# Altium PCB Volt Regulator.PcbDoc
Units mm, origin at the board's own origin, x right, y up, seen from the top; angles counter-clockwise.
Board outline 80 x 80 mm, 2 copper layers (Top Layer, Bottom Layer); 16 components, 5 nets, 39 pads, 0 vias.
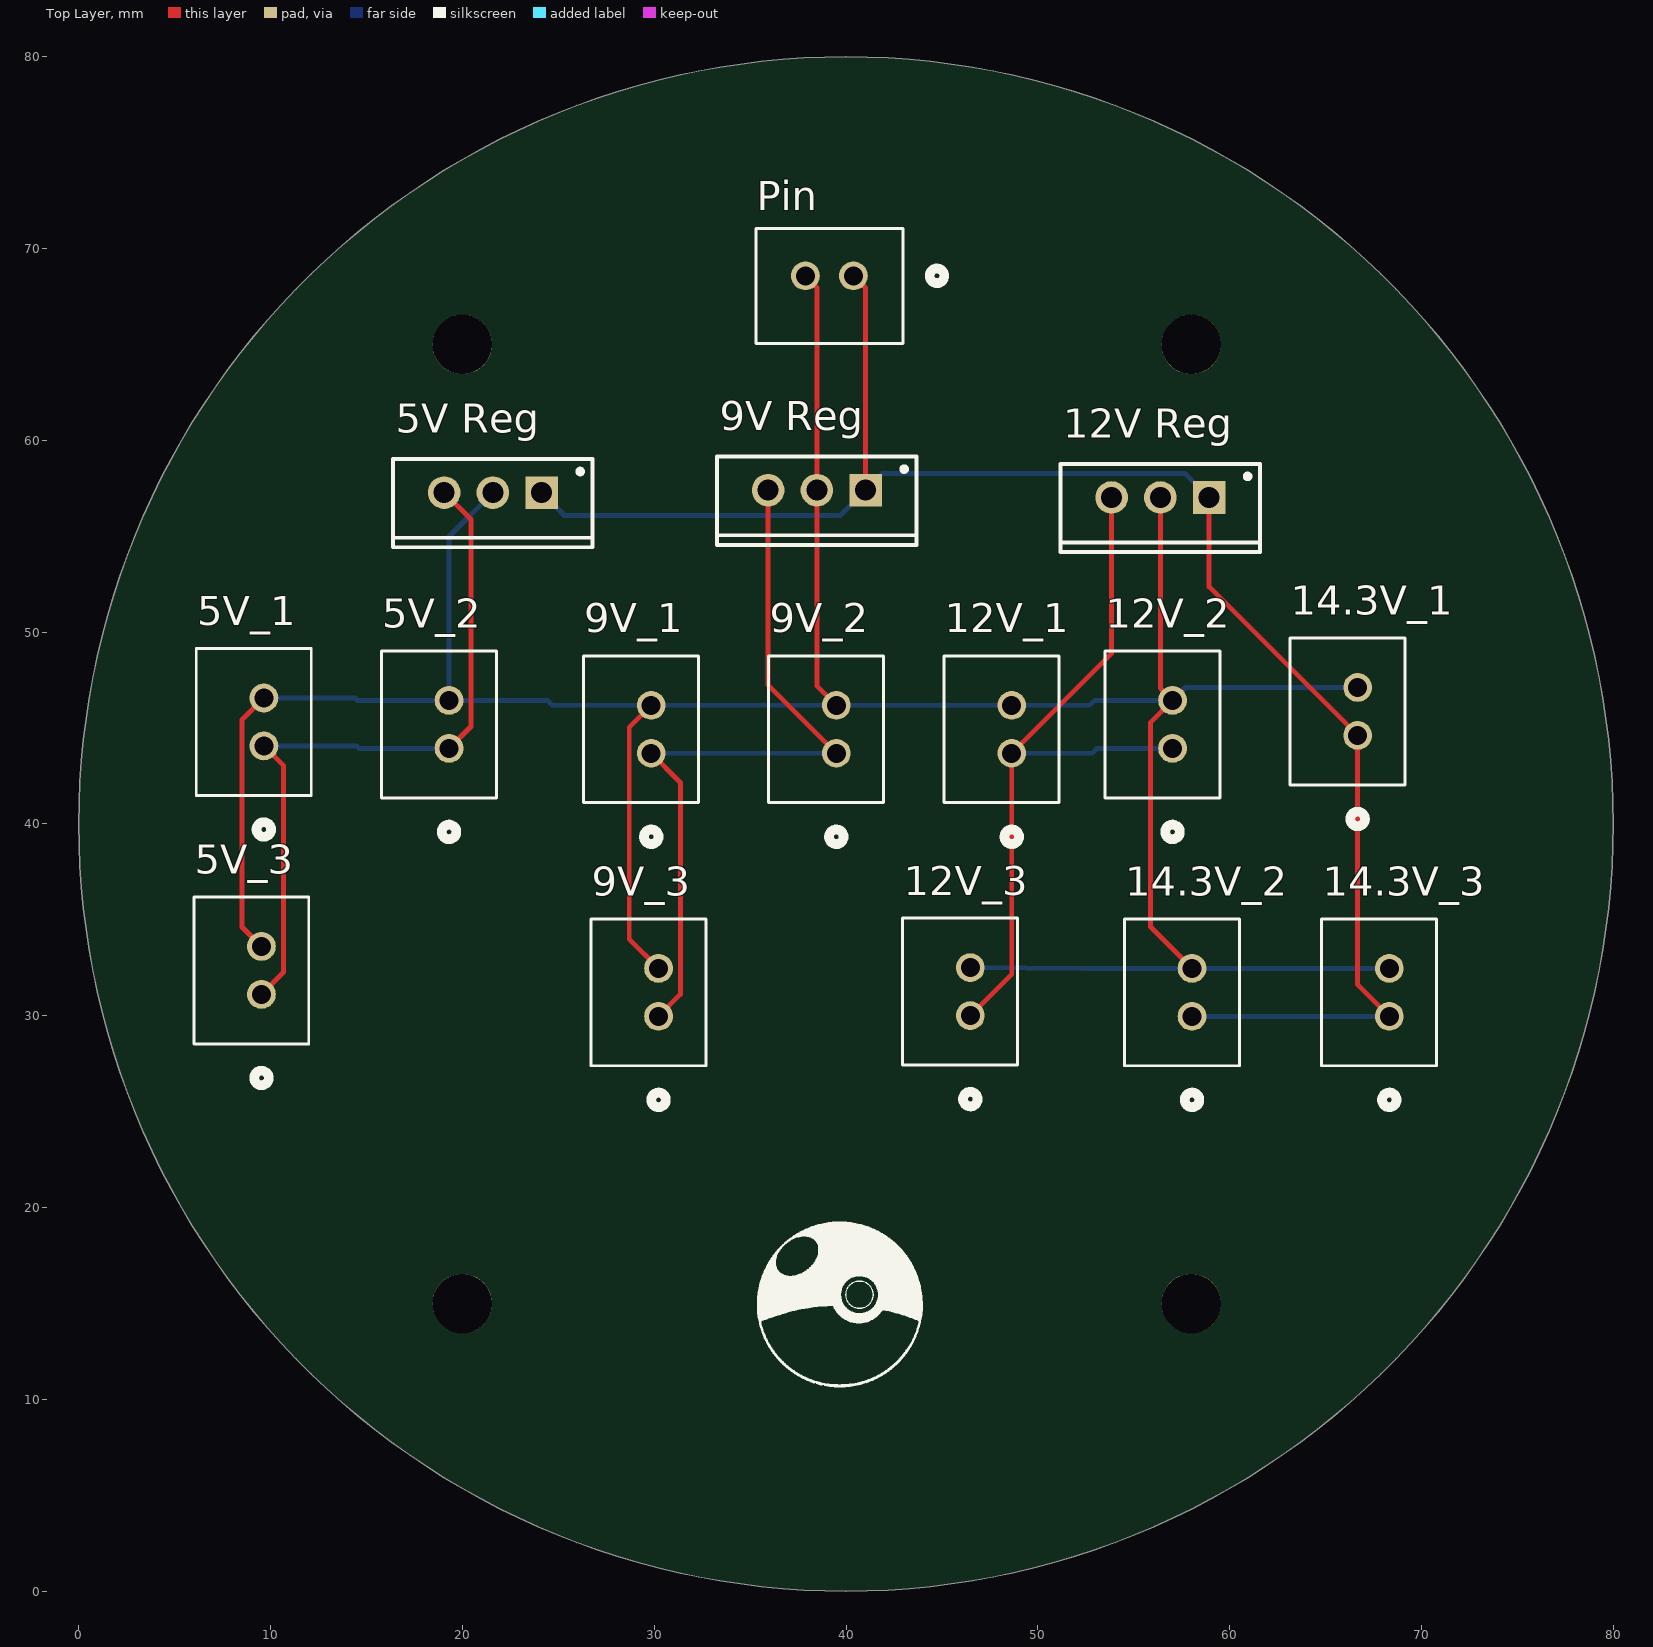
[diagram p0: Top Layer view]
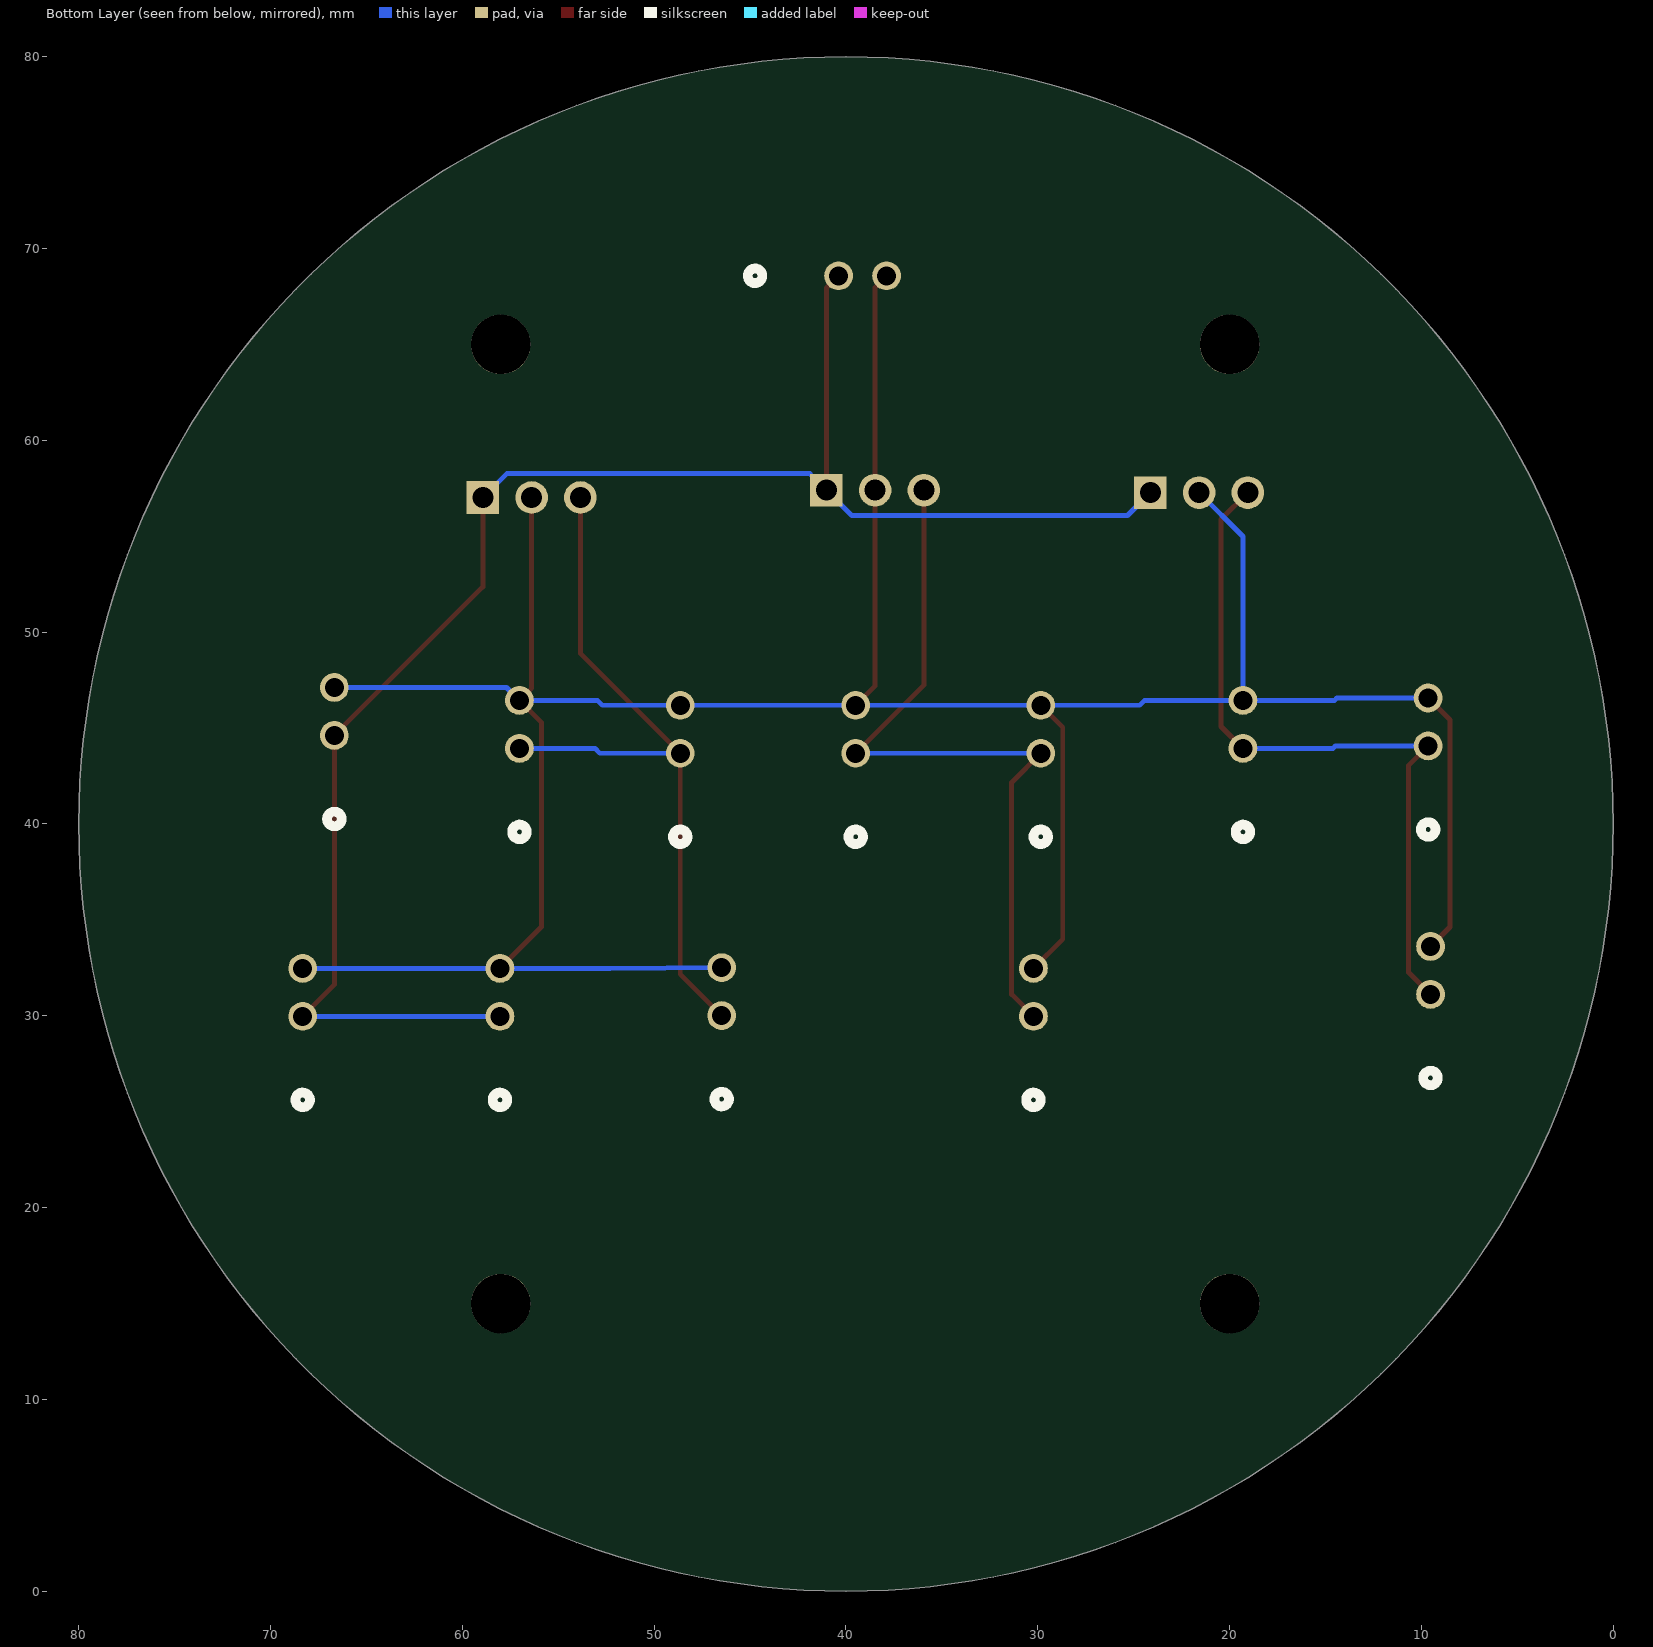
[diagram p1: Bottom Layer view, seen from below]

## Layer stack, top to bottom
Top Solder: solder mask 0.0102, Solder Resist, Dk 3.5
Top Layer: signal copper 0.0356
Dielectric 1: dielectric 0.32, FR-4, Dk 4.8
Bottom Layer: signal copper 0.0356
Bottom Solder: solder mask 0.0102, Solder Resist, Dk 3.5

## Board outline
40,0 cw(c40,40) 0,40 cw(c40,40) 40,80 cw(c40,40) 80,40 cw(c40,40)

## Design rules (kind name [scope] priority, off if disabled: settings)
Clearance [All] p1: gap=0.254 ignorepadtopadclearanceinfootprint=FALSE
PolygonConnect [All] p1: connectstyle=Relief reliefconductorwidth=0.254 reliefentries=4 polygonreliefangle="90 Angle" airgapwidth=0.254
RoutingVias [All] p1: holewidth=0.711 width=1.27 viastyle="Through Hole" minholewidth=0.711 minwidth=1.27 maxholewidth=0.711 maxwidth=1.27
SolderMaskExpansion [All] p1: expansion=0.102 istentingtop=FALSE
Width [All] p1: maxlimit=0.254 minlimit=0.254 preferedwidth=0.254
30 further rules are at their usual default settings.

## Components (designator, comment, footprint, x,y, rotation, side; value= is the part's Value field where it differs from the comment)
"5V Reg" "L7805ABV" TO220 21.59,57.277 r180 top
5V_1 "Connector" CONN_B2B-XH-A_JST 9.652,44.069 r90 top
5V_2 "Connector" CONN_B2B-XH-A_JST 19.304,43.942 r90 top
5V_3 "Connector" CONN_B2B-XH-A_JST 9.525,31.115 r90 top
"9V Reg" "L78L09ACZ-TR" TO220 38.481,57.404 r180 top
9V_1 "Connector" CONN_B2B-XH-A_JST 29.845,43.688 r90 top
9V_2 "Connector" CONN_B2B-XH-A_JST 39.497,43.688 r90 top
9V_3 "Connector" CONN_B2B-XH-A_JST 30.226,29.972 r90 top
"12V Reg" "L78L09ACZ-TR" TO220 56.388,57.023 r180 top
12V_1 "Connector" CONN_B2B-XH-A_JST 48.641,43.688 r90 top
12V_2 "Connector" CONN_B2B-XH-A_JST 57.023,43.942 r90 top
12V_3 "Connector" CONN_B2B-XH-A_JST 46.482,30.012 r90 top
14.3V_1 "Connector" CONN_B2B-XH-A_JST 66.675,44.617 r90 top
14.3V_2 "Connector" CONN_B2B-XH-A_JST 58.039,29.972 r90 top
14.3V_3 "Connector" CONN_B2B-XH-A_JST 68.326,29.972 r90 top
Pin "Connector" CONN_B2B-XH-A_JST 40.386,68.58 r180 top

## Footprints (in the part's own frame and the unit in brackets; to place one, negate y for a bottom-side part, rotate by r counter-clockwise, add the part's x,y. Pads: shape width x height; smd on the part's side, far side on the other; paste and mask are expansions set on the pad)
CONN_B2B-XH-A_JST [mil]
  round 59 / inner round 60 / far side round 59 hole 39 paste-99999 mask+0: 1(0,0) 2(98.43,0)
  silkscreen extent -186,-97 200,139
TO220 [mm] "TO, Thru-Hole, Vertical, Heatsink Mounted; 3 In-Line Leads; Pitch 2.54 mm"
  rect 1.7x1.7 hole 1.1: 1(-2.54,0)
  round 1.7 hole 1.1: 2(0,0) 3(2.54,0)
  silkscreen extent -5.2,-1.75 5.2,2.85, body extent -5.25,-1.8 5.25,2.9, height 19.7

## Part data
"5V Reg": "Fixed Positive Standard Regulator, 5VBIPolar, PSFM3", Case/Package=TO-220, Dropout Voltage1-Nom=2V, Input Voltage Absolute-Max=35V, Manufacturer=STMicroelectronics, Max Supply Voltage=25V, Min Input Voltage=7.5V, Operating Temperature, TJ-Max=125°C, Operating Temperature, TJ-Min=-40°C, Output Current1-Max=1.5A, Output Voltage1-Max=5.2V, Output Voltage1-Min=4.8V, Output Voltage1-Nom=5V, Package Equivalence Code=SIP3,.1TB, Package Shape=Rectangular, Package Style="FLANGE MOUNTMeter", Supplier Part Number=497-2947-5-ND, Voltage Tolerance-Max=4%, Adjustability=FIXED, Category="Voltage Regulators - Linear", Channels=1, ComponentLink1Description=https://datasheet.ciiva.com:443/pdfs/VipMasterIC/IC/SGST/SGST-S-A0006334694/SGST-S-A0006334694-1.pdf?src-supplier=IHS+Markit, ComponentLink1URL=https://datasheet.ciiva.com:443/pdfs/VipMasterIC/IC/SGST/SGST-S-A0006334694/SGST-S-A0006334694-1.pdf?src-supplier=IHS+Markit, ComponentLink2Description=https://datasheet.ciiva.com/15111/getdatasheetpartid-87002-15111517.pdf?src-supplier=Verical, ComponentLink2URL=https://datasheet.ciiva.com/15111/getdatasheetpartid-87002-15111517.pdf?src-supplier=Verical, ComponentLink3Description=https://datasheet.ciiva.com/1511/1805459-1511907.pdf?src-supplier=Element14, ComponentLink3URL=https://datasheet.ciiva.com/1511/1805459-1511907.pdf?src-supplier=Element14, ComponentLink4Description=https://datasheet.ciiva.com/1512/1696820-1512331.pdf?src-supplier=Element14, ComponentLink4URL=https://datasheet.ciiva.com/1512/1696820-1512331.pdf?src-supplier=Element14, JESD-609 Code=e3, Line Regulation-Max=0.05%, Load Regulation-Max=0.1%, Manufacturer Part Number=L7805ABV, Number of Outputs=1, Pins=3, Pricing="1=0.74, 10=0.648, 50=0.6086, 100=0.4968, 250=0.4614, 500=0.39268, 1000=0.31415, 2500=0.2847, 5000=0.26506 (USD)", Qualification Status="Not Qualified", Reach SVHC Compliant=No, Regulator Type="FIXED POSITIVE SINGLE OUTPUT STANDARD REGULATOR", RoHS=Yes, RoHS Compliant=Yes, Stock=5456, Supplier=Digikey, Surface Mount=No, Technology=BIPOLAR, Terminal Finish=Tin, Terminal Form="Through Hole", Terminal Pitch=2.54mm, Terminal Position=SINGLE
5V_1 5V_2 5V_3 9V_1 9V_2 9V_3 12V_1 12V_2 12V_3 14.3V_1 14.3V_2 14.3V_3 Pin: library part B2B-XH-A, "Header B2B-XH-A, 2.50mm, 2-contacts, top entry, THT /1000/box", Manufacturer=JST, Supplier Part Number=455-B2B-XH-A-ND, Category="FFC / FPC", ComponentLink1Description=https://www.distrelec.biz/Web/Downloads/_t/ds/xh-series_eng_tds.pdf?mime=application%2Fpdf&src-supplier=Distrelec, ComponentLink1URL=https://www.distrelec.biz/Web/Downloads/_t/ds/xh-series_eng_tds.pdf?mime=application%2Fpdf&src-supplier=Distrelec, Manufacturer Part Number=B2B-XH-A, Pricing="1=0.15, 10=0.122, 100=0.0898, 500=0.07432, 1000=0.06502, 5000=0.05573, 10000=0.05419 (USD)", RoHS=Yes, Stock=990478, Supplier=Digikey
"9V Reg" "12V Reg": "Fixed Positive Standard Regulator, 9VBIPolar", Case/Package=TO-92, Dropout Voltage1-Nom=1.7V, Input Voltage Absolute-Max=30V, Manufacturer=STMicroelectronics, Max Supply Voltage=23V, Min Input Voltage=11.5V, Operating Temperature, TJ-Max=125°C, Operating Temperature, TJ-Min=0°C, Output Current1-Max=70mA, Output Voltage1-Max=9.45V, Output Voltage1-Min=8.55V, Output Voltage1-Nom=9V, Package Equivalence Code=SIP3,.1,50, Package Shape=Round, Package Style=CYLINDRICALMeter, Supplier Part Number=497-15651-1-ND, Voltage Tolerance-Max=5%, Adjustability=FIXED, Category="Voltage Regulators - Linear", Channels=1, ComponentLink1Description=https://datasheet.ciiva.com:443/pdfs/VipMasterIC/IC/SGST/SGST-S-A0002857926/SGST-S-A0002857926-1.pdf?src-supplier=IHS+Markit, ComponentLink1URL=https://datasheet.ciiva.com:443/pdfs/VipMasterIC/IC/SGST/SGST-S-A0002857926/SGST-S-A0002857926-1.pdf?src-supplier=IHS+Markit, ComponentLink2Description=https://datasheet.ciiva.com/2060/cd00000446-2060086.pdf?src-supplier=Digikey, ComponentLink2URL=https://datasheet.ciiva.com/2060/cd00000446-2060086.pdf?src-supplier=Digikey, ComponentLink3Description=https://datasheet.ciiva.com/4883/cd00000446-4883326.pdf?src-supplier=Mouser, ComponentLink3URL=https://datasheet.ciiva.com/4883/cd00000446-4883326.pdf?src-supplier=Mouser, ComponentLink4Description=https://datasheet.ciiva.com/16443/cd00000446-16443420.pdf?src-supplier=Future+Electronics, ComponentLink4URL=https://datasheet.ciiva.com/16443/cd00000446-16443420.pdf?src-supplier=Future+Electronics, JESD-609 Code=e3, Line Regulation-Max=0.225%, Load Regulation-Max=0.08%, Manufacturer Part Number=L78L09ACZ-TR, Number of Outputs=1, Packaging="Tape and Reel", Pins=3, Pricing="1=0.34, 10=0.274, 25=0.2504, 100=0.1863, 250=0.16888, 500=0.13976, 1000=0.10482 (USD)", Qualification Status="Not Qualified", Reach SVHC Compliant=Yes, Regulator Type="FIXED POSITIVE SINGLE OUTPUT STANDARD REGULATOR", RoHS=Yes, RoHS Compliant=Yes, Stock=15716, Supplier=Digikey, Surface Mount=No, Technology=BIPOLAR, Terminal Finish=Tin, Terminal Form="Through Hole", Terminal Pitch=1.27mm, Terminal Position=BOTTOM

## Free pads (board coordinates)
  round 3.1 hole 3.1: 9(20,65) 10(58,65) 11(20,15) 12(58,15)

## Nets (pads, with @x,y where several pads share a name; then routed paths per layer and width w, separated by ;. In a path a pad name is that pad's centre, name@x,y a point inside that pad or via, vN(x,y) a via of type N, cw(c..) or ccw(c..) an arc to the next point about the centre after c; other vN are vias at no path point)
GND: 5V_1.2 5V_2.2 5V_3.2 9V_1.2 9V_2.2 9V_3.2 12V_1.2 12V_2.2 12V_3.2 14.3V_1.2 14.3V_2.2 14.3V_3.2 "5V Reg.2" "9V Reg.2" "12V Reg.2" Pin.2 | length 169.1
  Top Layer w0.254: 5V_3.2 8.509,34.631 8.509,45.426 5V_1.2 ; 9V_1.2 28.702,45.045 28.702,33.996 9V_3.2 ; Pin.2 38.481,67.985 38.481,57.404 38.481,47.204 9V_2.2 ; 56.388,57.023 56.388,47.077 12V_2.2 55.88,45.299 55.88,34.631 14.3V_2.2
  Bottom Layer w0.254: 5V_1.2 14.402,46.569 14.529,46.442 5V_2.2 ; 21.59,57.277 19.304,54.991 5V_2.2 ; 12V_3.2 52.288,32.472 14.3V_2.2 14.3V_3.2 ; 14.3V_1.2 57.698,47.117 12V_2.2 52.959,46.442 52.705,46.188 12V_1.2 9V_2.2 9V_1.2 24.689,46.188 24.435,46.442 5V_2.2
"Net5V Reg_1": 14.3V_1.1 14.3V_2.1 14.3V_3.1 "5V Reg.1" "9V Reg.1" "12V Reg.1" Pin.1 | length 89.4
  Top Layer w0.254: Pin.1 41.021,67.945 41.021,57.404 ; 58.928,57.023 58.928,52.364 14.3V_1.1 66.675,31.623 14.3V_3.1
  Bottom Layer w0.254: 24.13,57.277 25.324,56.083 39.7,56.083 41.021,57.404 41.885,58.268 57.683,58.268 58.928,57.023 ; 14.3V_2.1 14.3V_3.1
"Net5V Reg_3": 5V_1.1 5V_2.1 5V_3.1 "5V Reg.3" | length 37.9
  Top Layer w0.254: 5V_3.1 10.668,32.258 10.668,43.053 5V_1.1 ; 19.05,57.277 20.447,55.88 20.447,45.085 5V_2.1
  Bottom Layer w0.254: 5V_1.1 14.478,44.069 14.605,43.942 5V_2.1
"Net9V Reg_3": 9V_1.1 9V_2.1 9V_3.1 "9V Reg.3" | length 39.7
  Top Layer w0.254: 9V_1.1 31.369,42.164 31.369,31.115 9V_3.1 ; 35.941,57.404 35.941,47.244 9V_2.1
  Bottom Layer w0.254: 9V_1.1 9V_2.1
"Net12V Reg_3": 12V_1.1 12V_2.1 12V_3.1 "12V Reg.3" | length 38.5
  Top Layer w0.254: 12V_3.1 48.641,32.171 12V_1.1 53.848,48.895 53.848,57.023
  Bottom Layer w0.254: 12V_1.1 52.832,43.688 53.086,43.942 12V_2.1

## Silkscreen, mask and mechanical layers (free items; w line width, h text height)
Top Overlay:
  drawing of 2 lines, arcs and shapes, not listed
Board Outline:
  circle w0.254: c40,40 r40